# Altium PCB PCB.PcbDoc
Units mil, origin at the board's own origin, x right, y up, seen from the top; angles counter-clockwise.
Board outline 6000 x 4000 mil, 2 copper layers (Top Layer, Bottom Layer); 40 components, 33 nets, 129 pads, 0 vias.
Unrouted connection lines stored in the file: 66.
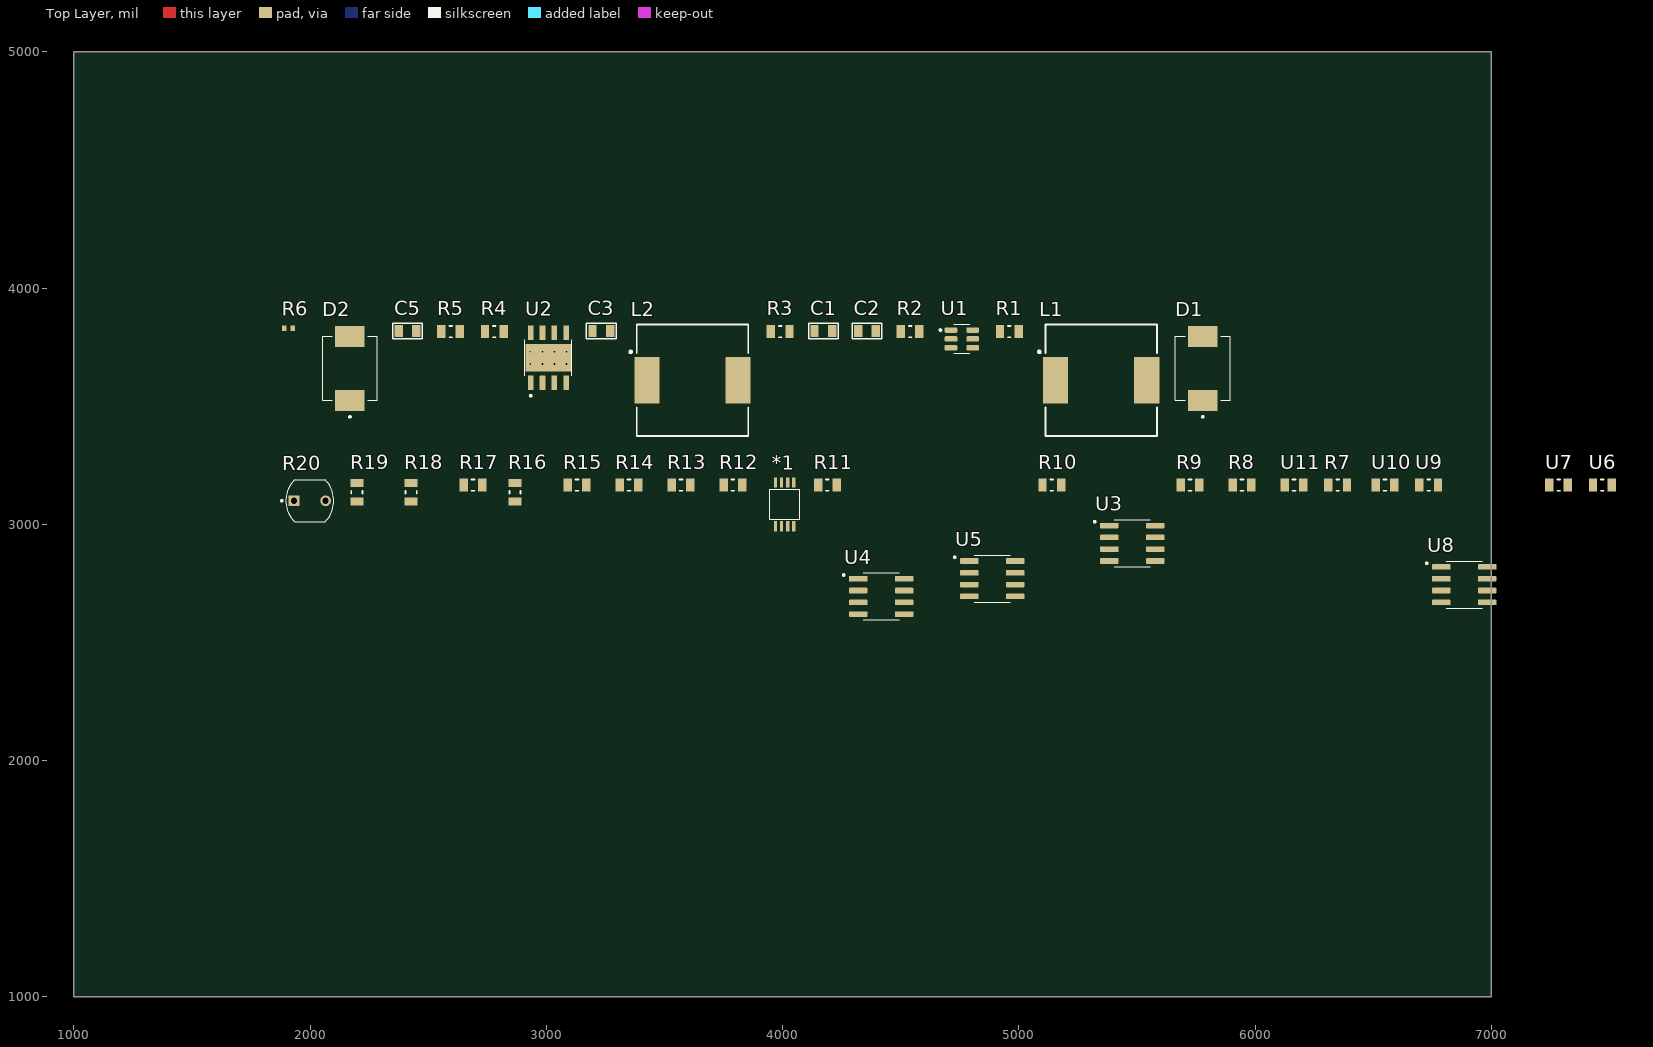
[diagram p0: Top Layer view]
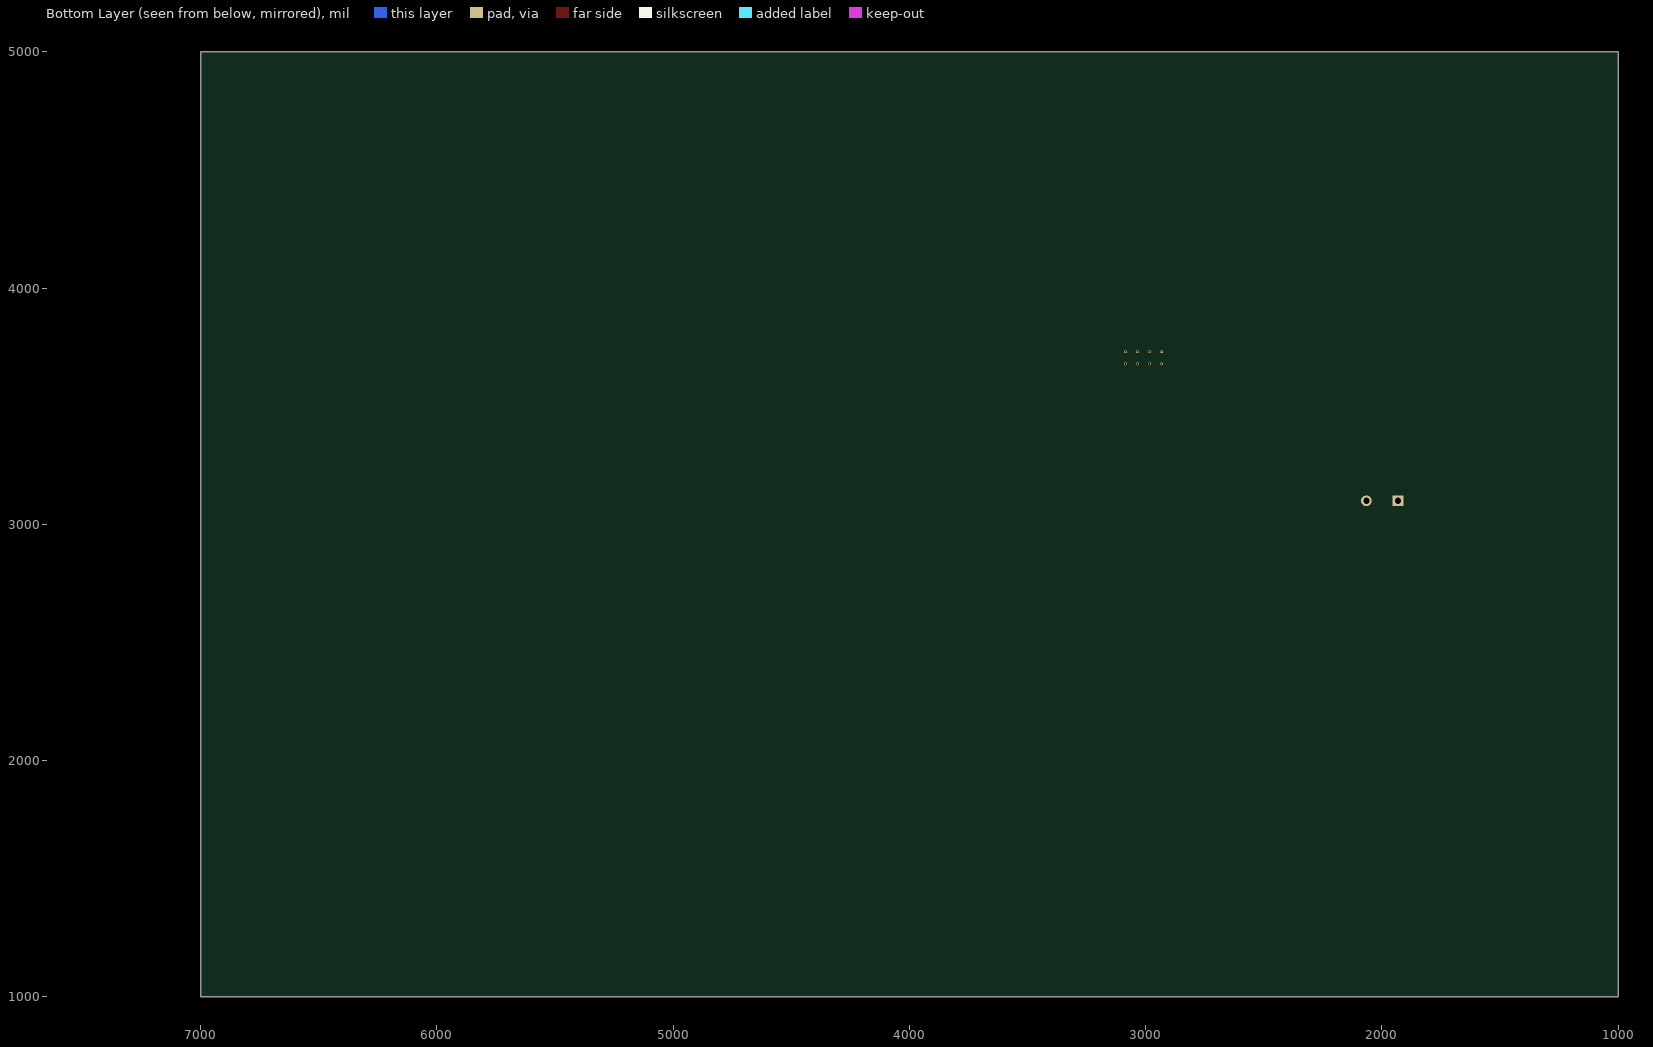
[diagram p1: Bottom Layer view, seen from below]

## Layer stack, top to bottom
Top Solder: solder mask 0.4, Solder Resist, Dk 3.5
Top Layer: signal copper 1.4
Dielectric 1: dielectric 12.6, FR-4, Dk 4.8
Bottom Layer: signal copper 1.4
Bottom Solder: solder mask 0.4, Solder Resist, Dk 3.5

## Board outline
1000,1000 7000,1000 7000,5000 1000,5000

## Design rules (kind name [scope] priority, off if disabled: settings)
Clearance [All] p1: gap=10 ignorepadtopadclearanceinfootprint=FALSE
PolygonConnect [All] p1: connectstyle=Relief reliefconductorwidth=10 reliefentries=4 polygonreliefangle="90 Angle" airgapwidth=10
RoutingVias [All] p1: holewidth=28 width=50 viastyle="Through Hole" minholewidth=28 minwidth=50 maxholewidth=28 maxwidth=50
SolderMaskExpansion [All] p1: expansion=4 istentingtop=FALSE
SupplyNets "Schematic Supply Nets_6" [InNet('+12')] p1: voltage=0.000
SupplyNets "Schematic Supply Nets_5" [InNet('+VBATT')] p2: voltage=0.000
SupplyNets "Schematic Supply Nets_4" [InNet('+5.5')] p3: voltage=0.000
SupplyNets "Schematic Supply Nets_3" [InNet('-12')] p4: voltage=0.000
SupplyNets "Schematic Supply Nets_2" [InNet('+4.0188')] p5: voltage=0.000
SupplyNets "Schematic Supply Nets_1" [InNet('+5')] p6: voltage=0.000
SupplyNets "Schematic Supply Nets" [InNet('GND')] p7: voltage=0.000
Width [All] p1: maxlimit=10 minlimit=10 preferedwidth=10
30 further rules are at their usual default settings.

## Classes and differential pairs
component class POWER: C1 C2 C3 C4 C5 D1 D2 L1 L2 R1 R2 R3 R4 R5 R6 U1 U2
component class AFE: *1 R7 R8 R9 R10 R11 R13 R14 R15 R16 R17 R19 R20 U4 U5 U9

## Components (designator, comment, footprint, x,y, rotation, side; value= is the part's Value field where it differs from the comment)
*1 "AD8237ARMZ" AD8237ARMZ 4008.5,3085 r0 top
C1 "22uF" CAP_0805 4173.5,3820 r0 top
C2 "22uF" CAP_0805 4358.5,3820 r0 top
C3 "10nF" CAP_0805 3233.5,3820 r0 top
C5 "68uF" CAP_0805 2413.5,3820 r0 top
D1 "SS34" DIO_SMA 5778.5,3660 r90 top
D2 "SS34" DIO_SMA 2168.5,3660 r90 top
L1 "22uF" IND_1280 5348.5,3610 r0 top
L2 "47uF" IND_1280 3618.5,3610 r0 top
R1 "10KR" RES_0805 4958.5,3815 r0 top
R2 "300KR" RES_0805 4538.5,3815 r0 top
R3 "1.5KR" RES_0805 3988.5,3815 r0 top
R4 "10KR" RES_0805 2778.5,3815 r0 top
R5 "39K" RES_0805 2593.5,3815 r0 top
R6 "11KR" RES_0402 1908.5,3830 r0 top
R7 "1.3K" RES_0805 6348.5,3165 r0 top
R8 "15K" RES_0805 5943.5,3165 r0 top
R9 "1KR" RES_0805 5723.5,3165 r0 top
R10 "44.2K" RES_0805 5138.5,3165 r0 top
R11 "1KR" RES_0805 4188.5,3165 r0 top
R12 "10KR" RES_0805 3788.5,3165 r0 top
R13 "10KR" RES_0805 3568.5,3165 r0 top
R14 "15K" RES_0805 3348.5,3165 r0 top
R15 "39K" RES_0805 3128.5,3165 r0 top
R16 "1KR" RES_0805 2868.5,3135 r90 top
R17 "1KR" RES_0805 2688.5,3165 r0 top
R18 "200R" RES_0805 2428.5,3135 r90 top
R19 "1.3K" RES_0805 2198.5,3135 r90 top
R20 "GL5528" GL5528 1998.5,3100 r0 top
U1 "MT3608" MT3608 4758.5,3785 r0 top
U2 "TPS5430DDAR" TPS5430_8SOIC 3008.5,3705 r90 top
U3 "OPA188AID" OPA 5480,2920 r0 top
U4 "OPA188AID" OPA 4417.24,2695 r0 top
U5 "OPA188AID" OPA 4887.24,2770 r0 top
U6 "10R" RES_0805 7468.5,3165 r0 top
U7 "10R" RES_0805 7283.5,3165 r0 top
U8 "OPA188AID" OPA 6885,2745 r0 top
U9 "10R" RES_0805 6733.5,3165 r0 top
U10 "10R" RES_0805 6548.5,3165 r0 top
U11 "10R" RES_0805 6163.5,3165 r0 top

## Footprints (in the part's own frame and the unit in brackets; to place one, negate y for a bottom-side part, rotate by r counter-clockwise, add the part's x,y. Pads: shape width x height; smd on the part's side, far side on the other; paste and mask are expansions set on the pad)
AD8237ARMZ [mm]
  rect 0.35x1.1 smd mask+0.05: +IN(-0.325,-2.35) +VS(0.975,2.35) -IN(0.325,-2.35) -VS(0.975,-2.35) BW(-0.975,-2.35) FB(-0.325,2.35) REF(0.325,2.35) VOUT(-0.975,2.35)
  silkscreen extent -1.6,-1.6 1.6,1.6, body extent -1.5,-2.45 1.5,2.45, height 1.1
CAP_0805 [mm]
  rect 0.9x1.3 smd: 1(-0.975,-0.025) 2(0.925,-0.025)
  silkscreen extent -1.63,-0.86 1.57,0.81, body extent -1.03,-0.65 0.97,0.6, height 0.6
DIO_SMA [mm]
  rect 2.25x3.18 smd: A(3.455,0) C(-3.455,0)
  silkscreen extent -5.3,-2.95 3.44,2.95, body extent -3.98,-2.95 3.98,2.95, height 2.65
GL5528 [mm]
  rect 1.158x1.158 hole 0.65: 1(-1.7,0)
  round 1.158 hole 0.65: 2(1.7,0)
  silkscreen extent -3.1,-2.27 2.58,2.27, body extent -2.54,-2.16 2.54,2.13, height 2.38
IND_1280 [mm]
  rect 2.7x5 smd: 1(-4.9,0) 2(4.9,0)
  silkscreen extent -6.77,-6 6,6, body extent -6,-6 6,6, height 8
MT3608 [mm]
  rrect50% 1.37x0.59 smd: 1(-1.17,0.95) 2(-1.17,0) 3(-1.17,-0.95) 4(1.17,-0.95) 5(1.17,0) 6(1.17,0.95)
  silkscreen extent -2.4,-1.57 0.85,1.57, body extent -1.4,-1.45 1.4,1.45, height 1.45
OPA [mm]
  rrect25% 1.97x0.6 smd: 1(-2.47,1.905) 2(-2.47,0.635) 3(-2.47,-0.635) 4(-2.47,-1.905) 5(2.47,-1.905) 6(2.47,-0.635) 7(2.47,0.635) 8(2.47,1.905)
  silkscreen extent -4.14,-2.52 1.95,2.52, body extent -3,-2.45 3,2.45, height 1.75
RES_0402 [mm]
  rect 0.49x0.6 smd: 1(-0.457,0) 2(0.457,0)
  body extent -0.53,-0.25 0.47,0.25, height 0.4
RES_0805 [mm]
  rect 0.9x1.4 smd: 1(-0.975,0.025) 2(1.025,0.025)
  silkscreen extent -0.12,-0.57 0.18,0.63, body extent -1.07,-0.67 1.13,0.73, height 0.5
TPS5430_8SOIC [mm]
  rrect5% 1.55x0.6 smd mask+0: 1(-2.7,1.905) 2(-2.7,0.635) 3(-2.7,-0.635) 4(-2.7,-1.905) 5(2.7,-1.905) 6(2.7,-0.635) 7(2.7,0.635) 8(2.7,1.905)
  rect 2.95x4.9 smd paste-3 mask+0: 9(0,0)
  round 0.3 hole 0.2: 10(-0.65,1.95) 11(0.65,1.95) 12(-0.65,0.65) 13(0.65,0.65) 14(-0.65,-0.65) 15(0.65,-0.65) 16(-0.65,-1.95) 17(0.65,-1.95)
  silkscreen extent -4.17,-2.52 1.95,2.52, body extent -2.82,-2.45 3.17,2.45, height 1.7

## Part data
C1 C2: library part CAP_22U_0805, "Tụ Gốm 0805 22uF 16V"
C3: library part CAP_10n_0805, "Tụ Gốm 0805 10nF 50V"
C5: library part CAP_68u_0805, "Tụ Gốm 0805 68pF 50V"
D1 D2: library part DIO_SS34, "SS34 SMC Diode Schottky 3A"
L1: library part IND_22U_1280, "Cuộn Cảm Dán SMD CDRH127 1280-220 22uH 6.3A"
L2: library part IND_47U_1280, "Cuộn Cảm Dán SMD CDRH127 1280-470 47uH 3.25A"
R1 R4 R12 R13: library part RES_10K_0805, "Điện Trở 10 KOhm 0805 1%"
R2: library part RES_30K_0805, "Điện Trở 30 KOhm 0805 1%"
R3: library part RES_1.5K_0805, "Điện Trở 1.5 KOhm 0805 1%"
R5 R15: library part RES_39K_0805, "Điện Trở 39 KOhm 0805 1%"
R6: library part RES_11K_0402, "Điện Trở 11 KOhm 0402 5%"
R7 R19: library part RES_1.3K_0805, "Điện Trở 1.3 KOhm 0805 5%"
R8 R14: library part RES_15K_0805, "Điện Trở 15 KOhm 0805 1%"
R9 R11 R16 R17: library part RES_1K_0805, "Điện Trở 1 KOhm 0805 1%"
R10: library part RES_44.2K_0805, "Điện Trở 44.2 KOhm 0805 1%"
R18: library part RES_200_0805, "Điện Trở 220 Ohm 0805 1%"
R20: "CDS PHOTORESISTOR"
U1: "MT3608 IC Điều Chỉnh Tăng Áp 2A SOT-23-6"
U2: "TPS5430DDAR IC Điều Chỉnh Giảm Áp 3A 8-SOIC"
U3 U4 U5 U8: "IC OPAMP ZERO-DRIFT 1 CIRC 8SOIC"
U6 U7 U9 U10 U11: library part RES_10R_0805, "Điện Trở 10 Ohm 0805 1%"

## Nets (pads, with @x,y where several pads share a name; then routed paths per layer and width w, separated by ;. In a path a pad name is that pad's centre, name@x,y a point inside that pad or via, vN(x,y) a via of type N, cw(c..) or ccw(c..) an arc to the next point about the centre after c; other vN are vias at no path point)
+4.0188: R9.1
+5: R12.2 R17.1
+5.5: *1.+VS C5.2 L2.2 R5.2
+12: C2.2 R2.2 R4.2 U2.7 U3.7 U4.7 U5.7 U8.7
+VBATT: C1.2 L1.1 R1.2 U1.5
-12: U3.4 U4.4 U5.4 U8.4
GND: *1.-IN *1.-VS *1.REF C1.1 C2.1 C5.1 R3.1 R6.1 R16.1 R18.1 R19.2 U1.2 U2.6 U2.9 U11.1
Net*1_+IN: *1.+IN R12.1 R18.2
Net*1_FB: *1.FB R10.2 R16.2 U4.3
Net*1_VOUT: *1.VOUT R10.1
NetC3_1: C3.1 U2.1
NetC3_2: C3.2 L2.1 U2.8
NetD1_1: L1.2 U1.1
NetR1_1: R1.1 U1.4
NetR2_1: R2.1 R3.2 U1.3
NetR4_1: R4.1 U2.5
NetR7_1: R7.1 R8.2
NetR7_2: R7.2 R13.1 U3.6
NetR8_1: R8.1 R9.2 U3.2
NetR11_1: R11.1 U4.2 U4.6
NetR11_2: R11.2 R14.2 U3.3
NetR13_2: R13.2 R15.1 U5.3
NetR14_1: R14.1 R19.1
NetR15_2: R15.2 R17.2
NetR21_1: U7.2 U8.2
NetR21_2: U6.1
NetR22_2: U7.1
NetR23_1: U5.2 U5.6
NetR23_2: U9.1
NetR24_1: U8.3 U9.2
NetR24_2: U10.1
NetU6_2: U6.2 U8.6 U10.2 U11.2
VSENSE: R5.1 R6.2 U2.4
pads on no net: *1.BW D1.A D1.C D2.A D2.C R20.1 R20.2 U1.6 U2.2 U2.3 U2.10 U2.11 U2.12 U2.13 U2.14 U2.15 U2.16 U2.17 U3.1 U3.5 U3.8 U4.1 U4.5 U4.8 U5.1 U5.5 U5.8 U8.1 U8.5 U8.8